# Altium PCB Test (1).PcbDoc
Units mil, origin at the board's own origin, x right, y up, seen from the top; angles counter-clockwise.
Board outline 3790.84 x 1700 mil, 2 copper layers (Top Layer, Bottom Layer); 15 components, 4 nets, 49 pads, 0 vias.
Unrouted connection lines stored in the file: 8.
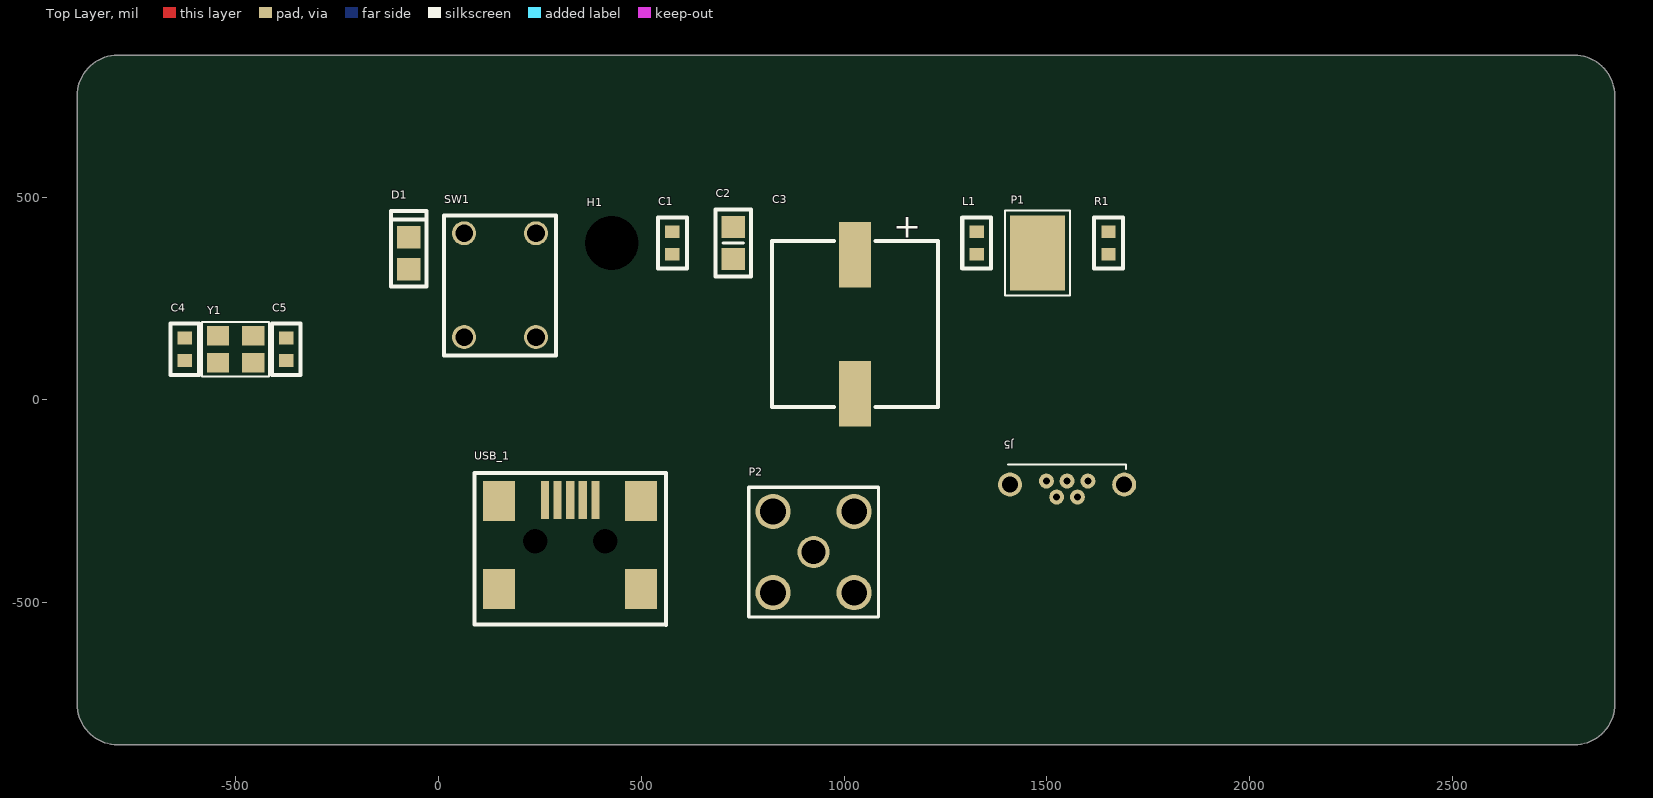
[diagram p0: Top Layer view]
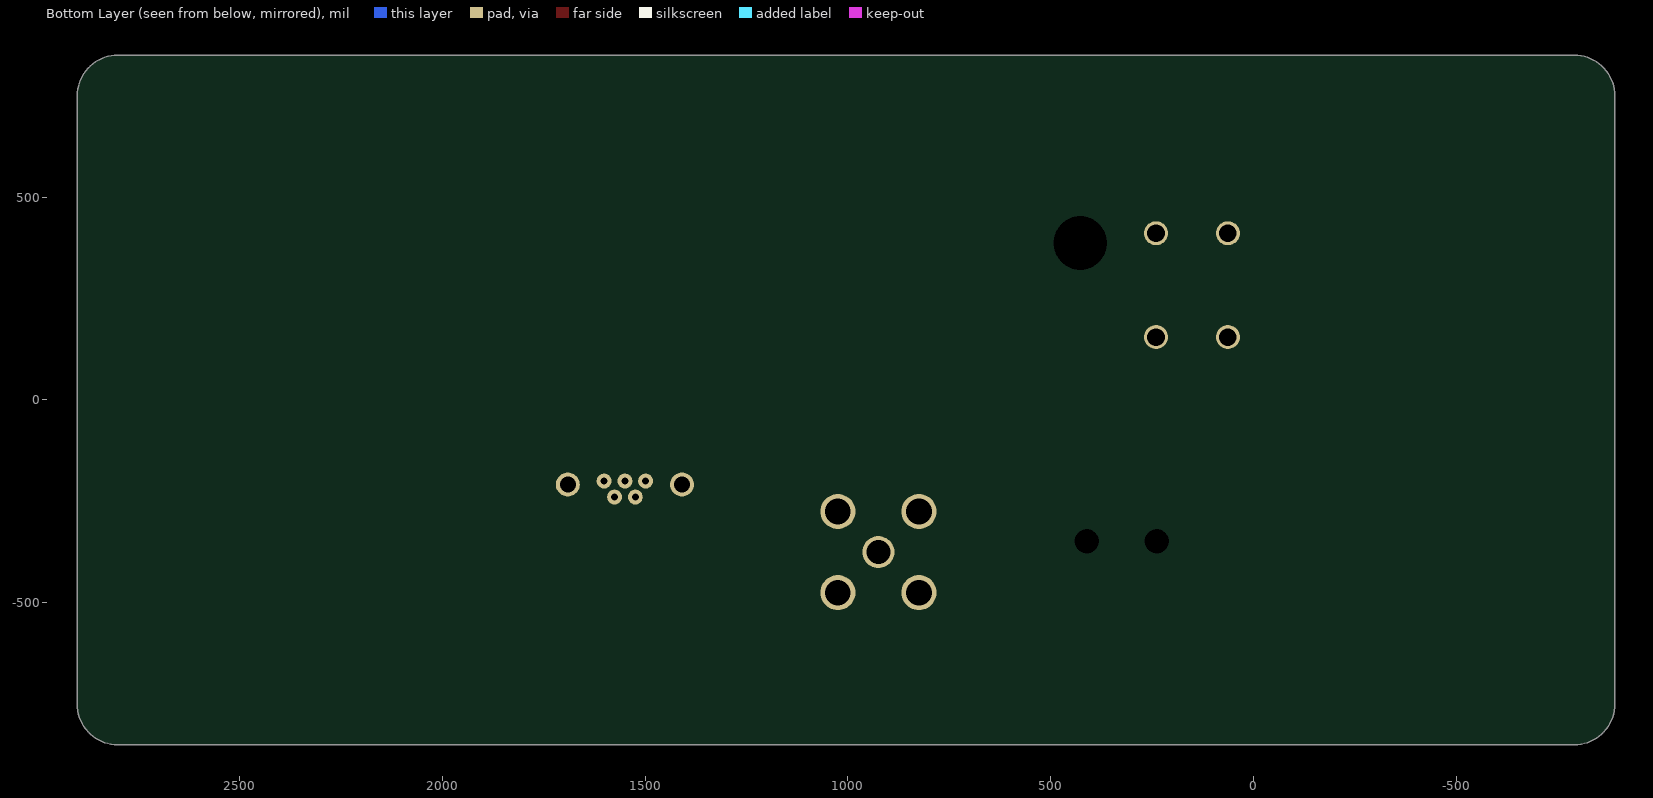
[diagram p1: Bottom Layer view, seen from below]

## Layer stack, top to bottom
Top Solder: solder mask 0.4, Solder Resist, Dk 3.5
Top Layer: signal copper 1.4
Dielectric1: dielectric 12.6, FR-4, Dk 4.8
Bottom Layer: signal copper 1.4
Bottom Solder: solder mask 0.4, Solder Resist, Dk 3.5

## Board outline
-790.5,-850 cw(c-790.5,-750) -890.5,-750 -890.5,750 cw(c-790.5,750) -790.5,850 2800.02,850 cw(c2800.02,750) 2900.02,750 2900,750 2900,-750 2900.34,-750 cw(c2800.34,-750) 2800.34,-850

## Design rules (kind name [scope] priority, off if disabled: settings)
AssemblyTestPointUsage [All] p1 off:
AssemblyTestpoint [All] p1 off: testpointundercomponent=TRUE minsize=40 maxsize=100 preferedsize=60 minholesize=0 maxholesize=40 preferedholesize=32 testpointgrid=1 usegrid=TRUE gridtolerance=0.01 allowsidetop=TRUE allowsidebottom=TRUE
Clearance [All] p1: gap=7
DiffPairsRouting [All] p1: maxlimit=200 minlimit=10 mostfreqgap=10 toplayer_minwidth=8 toplayer_maxwidth=15 toplayer_prefwidth=15 bottomlayer_minwidth=8 bottomlayer_maxwidth=15 bottomlayer_prefwidth=15 maxuncoupledlength=1000
FabricationTestPointUsage [All] p1 off: valid=0 allowmultiple=FALSE
FabricationTestpoint [All] p1 off: side=3 testpointundercomponent=TRUE minsize=40 maxsize=100 preferedsize=60 minholesize=0 maxholesize=40 preferedholesize=32 testpointgrid=1 allowsidetop=TRUE allowsidebottom=TRUE usegrid=TRUE gridtolerance=0.01
HoleSize [All] p1: absolutevalues=TRUE maxlimit=250 minlimit=1 maxpercent=80.000 minpercent=20.000
HoleToHoleClearance [All] p1: gap=12 allowstackedmicrovias=FALSE
MinimumSolderMaskSliver [All] p1: minsoldermaskwidth=6
PasteMaskExpansion [All] p1: expansion=-2
PlaneConnect [All] p1: planeconnectstyle=Relief reliefexpansion=20 reliefentries=4 reliefconductorwidth=20 reliefairgap=10
PolygonConnect PolygonConnect_1 [(InComponent('Q10') OR InComponent('Q11') OR InComponent('Q12')OR InComponent('Q13')OR InComponent('Q14')OR InComponent('Q15'))] p1: connectstyle=Direct reliefconductorwidth=10 reliefentries=4 polygonreliefangle="90 Angle" airgapwidth=10
PolygonConnect PolygonConnect_2 [(InPadClass('All Pads'))] p2: connectstyle=Relief reliefconductorwidth=10 reliefentries=4 polygonreliefangle="90 Angle" airgapwidth=10
PolygonConnect [All] p3: connectstyle=Direct reliefconductorwidth=10 reliefentries=4 polygonreliefangle="90 Angle" airgapwidth=10
RoutingVias [All] p1: holewidth=14 width=32 viastyle="Through Hole" minholewidth=14 minwidth=32 maxholewidth=14 maxwidth=32
SMDEntry [All] p1: side=TRUE corner=FALSE anyangle=FALSE
SilkToSilkClearance [All] p1: silktosilkclearance=4
SilkToSolderMaskClearance SilkscreenOverComponentPads [IsPad] p1: minsilkscreentomaskgap=4 clearancetoexposedcopper=TRUE
SolderMaskExpansion SolderMaskExpansion_1 [InComponent('U2')] p1: expansion=0
SolderMaskExpansion [All] p2: expansion=4
Width Width_3 [InNet('GND')] p1: maxlimit=80 minlimit=6 preferedwidth=12 minimp=50.000000 maximp=50.000000 favimp=50.000000
Width Width_2 [InNet('3.3V')] p2: maxlimit=40 minlimit=6 preferedwidth=12
Width Width_1 [InNet('5V')] p3: maxlimit=40 minlimit=6 preferedwidth=12
Width [All] p4: maxlimit=80 minlimit=8 preferedwidth=8 minimp=50.000000 maximp=50.000000 favimp=50.000000
18 further rules are at their usual default settings.

## Classes and differential pairs
component class Lib: C1 C2 C3 C4 C5 D1 H1 L1 P1 P2 R1 SW1 USB_1 Y1

## Components (designator, comment, footprint, x,y, rotation, side; value= is the part's Value field where it differs from the comment)
C1 "CL10B104MB8NNNC" 1608[0603]C 577,387 r90 top
C2 "GRM21BC81C106KE15L" 6-0805_MC 727,387 r90 top
C3 "Cap Pol1" EEE-FPV391UAP 1027,187 r0 top
C4 "CL05C180JB5NNNC" 1608[0603]C -625,125 r270 top
C5 "CL05C180JB5NNNC" 1608[0603]C -375,125 r90 top
D1 "LG R971-KN-1" 6-0805_M_LED -73,362 r90 top
H1 "stand_off" M3_Standoff_3 427,387 r0 top
J5 "614105150721" 614105150721 1550,-200 r0 top
L1 "CIM10U800NC" 1608[0603]R 1327,387 r90 top
P1 "5016KCT-ND" GND_CLIP3 1477,362 r90 top
P2 "5-1814832-1" SMA1 925,-375 r0 top
R1 "MCR03EZPFX1002" 1608[0603]R 1652,387 r90 top
SW1 "1825910-7" Tact_ButtonVV 152,287 r90 top
USB_1 "USB-M2xFxx" USB_Mini_B_SMT 325,-200 r0 top
Y1 "CX3225GB12000P0HPQCC" 3225_Crystal -500,125 r0 top

## Footprints (in the part's own frame and the unit in brackets; to place one, negate y for a bottom-side part, rotate by r counter-clockwise, add the part's x,y. Pads: shape width x height; smd on the part's side, far side on the other; paste and mask are expansions set on the pad)
6-0805_M_LED [mm] "Chip Resistor, Body 2.0x1.2mm, IPC Low Density"
  rect 1.4x1.5 smd: 1(-1,0) 2(1,0)
  silkscreen extent -2.1,-1.1 2.65,1.1, body extent -1.05,-0.67 1.05,0.68, height 0.9
6-0805_MC [mm] "Chip Resistor, Body 2.0x1.2mm, IPC Low Density"
  rect 1.4x1.5 smd: 1(-1,0) 2(1,0)
  silkscreen extent -2.1,-1.1 2.1,1.1, body extent -1,-0.62 1,0.63, height 0.59
1608[0603]C [mm] "Chip Capacitor, Body 1.6x0.8mm, IPC High Density"
  rect 0.8x0.9 smd: 1(-0.7,0) 2(0.7,0)
  silkscreen extent -1.6,-0.9 1.6,0.9, body extent -0.8,-0.4 0.8,0.4, height 0.78
1608[0603]R [mm] "Chip Capacitor, Body 1.6x0.8mm, IPC High Density"
  rect 0.8x0.9 smd: 1(-0.7,0) 2(0.7,0)
  silkscreen extent -1.6,-0.9 1.6,0.9, body extent -0.8,-0.4 0.8,0.4, height 0.44
3225_Crystal [mm] "12 MHz Micro Crystal"
  rect 1.4x1.2 smd: 1(-1.1,-0.85) 2(1.1,-0.85) 3(1.1,0.85) 4(-1.1,0.85)
  silkscreen extent -2.1,-1.7 2.1,1.7, body extent -1.6,-1.25 1.6,1.25, height 0.81
614105150721 [mm] "WR-COM_USB_Micro Type B_Vertical_THT Micro Type B Vertical THT"
  round 0.94 hole 0.44 mask+0: 1(-1.3,0) 2(-0.65,-1) 3(0,0) 4(0.65,-1) 5(1.3,0)
  round 1.5 hole 1 mask+0: Z1(-3.575,-0.22) Z2(3.575,-0.22)
  silkscreen extent -3.7,0.75 3.7,1.05, body extent -3.99,-1.57 4.01,1.33, height 5.62
EEE-FPV391UAP [mm]
  rect 2x4.1 smd: 1(0,4.35) 2(0,-4.35)
  silkscreen extent -5.2,-5.2 5.2,5.2, body extent -5.15,-5.09 5.15,5.21, height 10.5
GND_CLIP3 [mil] "Ground clip for a probe"
  rect 185x135 smd: 1(0,0)
  silkscreen extent -105,-80 105,80, body extent -75,-55 75,55, height 91
M3_Standoff_3 [mil]
  round 0 hole 132 unplated paste+66 mask+66: 1(0,0)
SMA1 [mm]
  round 2 hole 1.5: 1(0,0)
  round 2.2 hole 1.6: 2(-2.54,-2.54) 2(-2.54,2.54) 2(2.54,-2.54) 2(2.54,2.54)
  silkscreen extent -4.06,-4.06 4.06,4.06, body extent -3.15,-3.15 3.16,3.16, height 9.55
Tact_ButtonVV [mm]
  round 1.5 hole 1.1: 1(-3.35,-2.25) 2(3.15,-2.25) 3(-3.35,2.25) 4(3.15,2.25)
  silkscreen extent -4.5,-3.5 4.25,3.5, body extent -4.21,-3 4.01,3, height 9.5
USB_Mini_B_SMT [mil] "USB Mini B connector SMD"
  rect 20x94 smd: 1(-62,-47) 2(-31,-47) 3(0,-47) 4(31,-47) 5(62,-47)
  rect 79x98 smd: 6(-175,-49) 7(-175,-266) 8(175,-266) 9(175,-49)
  round 0 hole 60 unplated mask+36: ""(-86,-148) ""(86,-148)
  silkscreen extent -236,-354 236,20, body extent -202,-385 188,-21, height 159

## Part data
C1 C2 C4 C5: library part "Cap Semi", "Capacitor (Semiconductor SIM Model)"
C3: "Polarized Capacitor (Radial)"
D1: library part LED3
J5: library part "WR-Communication Connectors 614105150721", "WR-COM_USB_Micro Type B_Vertical_THT"
L1: library part Inductor, "Inductor"
P1: library part GND_CLIP, "GND_CLIP"
P2: library part SMB, "SMB Straight Connector"
R1: library part Res1, "Resistor"
SW1: library part D6x-XX
USB_1: "USB Mini-B for USB-M2xFxx"
Y1: library part 12MHz_Crystal, "12MHz Micro Crystal"

## Nets (pads, with @x,y where several pads share a name; then routed paths per layer and width w, separated by ;. In a path a pad name is that pad's centre, name@x,y a point inside that pad or via, vN(x,y) a via of type N, cw(c..) or ccw(c..) an arc to the next point about the centre after c; other vN are vias at no path point)
12MHZ_XIN: C4.2 Y1.1
12MHZ_XOUT: C5.2 Y1.3
GND: C4.1 C5.1 SW1.1 SW1.2 Y1.2 Y1.4
NRST: SW1.3 SW1.4
pads on no net: C1.1 C1.2 C2.1 C2.2 C3.1 C3.2 D1.1 D1.2 H1.1 J5.1 J5.2 J5.3 J5.4 J5.5 J5.Z1 J5.Z2 L1.1 L1.2 P1.1 P2.1 P2.2 R1.1 R1.2 USB_1. USB_1.1 USB_1.2 USB_1.3 USB_1.4 USB_1.5 USB_1.6 USB_1.7 USB_1.8 USB_1.9

## Text inside footprints (layer, text, board x,y; h text height)
C3: Top Overlay "+" at 1121.49,399.6 h60